# EAGLE board 1 (EAGLE 6.1)

Size 294.62 x 148.26 mm. Coordinates in mm from the lower left corner, seen from the top.
Outline: 0,0 294.62,0 294.62,148.26 0,148.26 0,0
Copper layers (1*16): Top 0.035mm / dielectric 1.5mm / Bottom 0.035mm
Design rules: minimum track width 10mil, minimum drill 24mil, track to track 8mil, track to pad 8mil, pad to pad 8mil, via to via 8mil, smd to smd 8mil, copper to edge 40mil, drill to drill 8mil, minimum pad ring 10mil, minimum via ring 8mil, stop-mask expansion 4mil, vias tented up to drill 0mil, thermal gap 10mil

## Footprints (pad centres in the part's own frame; a part is rotated, then mirrored left to right if it is on the bottom)
C050-035X075 = drill 0.7 pad 1.676 square: 1 -2.54,0; 2 2.54,0
E3,5-8 = drill 0.813 pad 1.6 square: + -1.778,0; - 1.778,0
CAP-PTH-5MM = drill 0.7 pad 1.651 square: 1 -2.5,0; 2 2.5,0
HC49U-V = drill 0.813 square: 1 -2.413,0; 2 2.413,0
DO35-7 = drill 0.813 long: A 3.81,0; C -3.81,0
DO35-10 = drill 0.813 long: A 5.08,0; C -5.08,0
CRAA = drill 1.321 pad 3.15 octagon: + -25.4,-5.08; +@1 -25.4,5.08; - 25.4,0
DIL08 = drill 0.813 long: 1 -3.81,-3.81; 2 -1.27,-3.81; 3 1.27,-3.81; 4 3.81,-3.81; 5 3.81,3.81; 6 1.27,3.81; 7 -1.27,3.81; 8 -3.81,3.81
DIL28-3 = drill 0.813 long: 1 -16.51,-3.81; 2 -13.97,-3.81; 3 -11.43,-3.81; 4 -8.89,-3.81; 5 -6.35,-3.81; 6 -3.81,-3.81; 7 -1.27,-3.81; 8 1.27,-3.81; 9 3.81,-3.81; 10 6.35,-3.81; 11 8.89,-3.81; 12 11.43,-3.81; 13 13.97,-3.81; 14 16.51,-3.81; 15 16.51,3.81; 16 13.97,3.81; 17 11.43,3.81; 18 8.89,3.81; 19 6.35,3.81; 20 3.81,3.81; 21 1.27,3.81; 22 -1.27,3.81; 23 -3.81,3.81; 24 -6.35,3.81; 25 -8.89,3.81; 26 -11.43,3.81; 27 -13.97,3.81; 28 -16.51,3.81
2X3_OFFSET = drill 1.118 pad 1.88 offset: 1 -2.54,-1.27; 2 -2.54,1.27; 3 0,-1.27; 4 0,1.27; 5 2.54,-1.27; 6 2.54,1.27
1X02 = drill 1.016 long: 1 -1.27,0; 2 1.27,0
1X06 = drill 1.016 long: 1 -6.35,0; 2 -3.81,0; 3 -1.27,0; 4 1.27,0; 5 3.81,0; 6 6.35,0
1X05 = drill 1.016 long: 1 -5.08,0; 2 -2.54,0; 3 0,0; 4 2.54,0; 5 5.08,0
G5LE = drill 1.321 long: 1 -7.493,-5.969; 2 -7.493,5.969; O 4.699,5.969; P -9.525,0; S 4.699,-5.969
LED5MM = drill 0.813 octagon: A -1.27,0; K 1.27,0
LSP11 = drill 1.118 pad 2.159 octagon: MP 0,0
MCS10B = drill 1.016 pad 2.159 octagon: MP 0,0
TO-92-AMMO = drill 0.813 pad 1.88: 1 -2.54,0; 2 0,0; 3 2.54,0
0207/10 = drill 0.813 pad 1.778 square: 1 -5.08,0; 2 5.08,0
RTRIM3339P = drill 0.61: 1 -2.54,0; 2 0,-2.54; 3 2.54,0
0207/15 = drill 0.7 pad 1.676 square: 1 -7.62,0; 2 7.62,0
0207/12 = drill 0.7 pad 1.676 square: 1 -6.35,0; 2 6.35,0
AXIAL-0.4 = drill 0.9 pad 1.88 square: P$1 -5.08,0; P$2 5.08,0
TACTILE-PTH = drill 1.016 pad 1.88: 1 -3.251,2.261; 2 3.251,2.261; 3 -3.251,-2.261; 4 3.251,-2.261
BUZZER-12MM = drill 0.9 pad 1.778: + 3.25,0; - -3.25,0
LCD-16X2 = drill 1.016 pad 1.88 square: 1 -32,15.5 | drill 1.016 pad 1.88: 2 -29.46,15.5; 3 -26.92,15.5; 4 -24.38,15.5; 5 -21.84,15.5; 6 -19.3,15.5; 7 -16.76,15.5; 8 -14.22,15.5; 9 -11.68,15.5; 10 -9.14,15.5; 11 -6.6,15.5; 12 -4.06,15.5; 13 -1.52,15.5; 14 1.02,15.5; 15 3.56,15.5; 16 6.1,15.5 | hole 2.8: -37.5,15.5; -37.5,-15.5; 37.5,15.5; 37.5,-15.5
1X10 = drill 1.016 long: 17 25.5,3.81; ADC0 -25.5,-11.43; AGND 25.5,-3.81; BUZZER 25.5,6.35; CTS -25.5,-8.89; GND -25.5,6.35; GND1 -25.5,3.81; GND2 25.5,-11.43; MIC1 25.5,-6.35; MIC2 25.5,-8.89; NWK 25.5,8.89; PS-ON -25.5,1.27; RTC 25.5,11.43; RTS -25.5,-6.35; RXD -25.5,-1.27; SPK1 25.5,-1.27; SPK2 25.5,1.27; TXD -25.5,-3.81; VDD -25.5,11.43; VDD1 -25.5,8.89
W237-4 = drill 1.194 long: 1 -7.5,-1.27; 2 -2.5,-1.27; 3 2.5,-1.27; 4 7.5,-1.27
W237-102 = drill 1.194 long: 1 -2.5,-1.27; 2 2.5,-1.27
TC38H = drill 0.813 pad 1.676: 1 -1.27,0; 2 1.27,0

## Placement (x,y rotation side)
C1  [C050-035X075]  115.57,22.86 0 top
C2  [E3,5-8]  152.4,22.86 0 top
C3  [CAP-PTH-5MM]  156.21,76.2 270 top
C4  [CAP-PTH-5MM]  153.67,76.2 270 top
C5  [CAP-PTH-5MM]  143.51,49.53 0 top
C6  [CAP-PTH-5MM]  158.75,76.2 90 top
CRYSTAL  16-MHZ  [HC49U-V]  156.21,68.58 180 top
D1  1N4148DO35-7  [DO35-7]  101.6,25.4 0 top
D2  1N4148DO35-10  [DO35-10]  265.43,91.44 270 top
D3  1N4148DO35-10  [DO35-10]  265.43,72.39 270 top
D4  1N4148DO35-10  [DO35-10]  265.43,54.61 270 top
D5  1N4148DO35-10  [DO35-10]  265.43,36.83 270 top
G1  CR-AA  [CRAA]  50.8,40.64 0 top
IC2  DS1307  [DIL08]  193.04,34.29 180 top
IC3  AT24CP  [DIL08]  176.53,34.29 180 top
IC4  MEGA8-P  [DIL28-3]  158.75,57.15 180 top
J1  AVR_SPI_PRG_6OFFSET_PADS  [2X3_OFFSET]  205.74,73.66 90 top
JP1  [1X02]  195.58,171.45 0 top  (outside the outline)
JP2  [1X06]  97.79,107.95 90 top
JP3  [1X06]  101.6,107.95 90 top
JP4  [1X05]  83.82,83.82 270 top
K1  G5LE  [G5LE]  247.65,90.17 180 top
K2  G5LE  [G5LE]  247.65,72.39 180 top
K3  G5LE  [G5LE]  247.65,54.61 180 top
K4  G5LE  [G5LE]  247.65,36.83 180 top
LED1  [LED5MM]  114.3,95.25 0 top
LED2  [LED5MM]  114.3,109.22 0 top
LED3  [LED5MM]  109.22,125.73 0 top
LSP1  LSP11  [LSP11]  157.48,45.72 0 top
LSP2  MCS10B  [MCS10B]  186.69,173.99 0 top  (outside the outline)
LSP3  MCS10B  [MCS10B]  234.95,166.37 0 top  (outside the outline)
Q1  [TO-92-AMMO]  149.86,31.75 0 top
Q2  [TO-92-AMMO]  229.87,71.12 270 top
Q3  [TO-92-AMMO]  229.87,62.23 90 top
Q4  [TO-92-AMMO]  229.87,54.61 270 top
Q5  [TO-92-AMMO]  229.87,46.99 90 top
Q6  [TO-92-AMMO]  250.19,121.92 180 top
Q7  [TO-92-AMMO]  250.19,116.84 180 top
Q8  [TO-92-AMMO]  250.19,111.76 180 top
Q9  [TO-92-AMMO]  250.19,106.68 180 top
Q10  [TO-92-AMMO]  97.79,40.64 0 top
Q11  [TO-92-AMMO]  147.32,90.17 0 top
R1  [0207/10]  111.76,83.82 0 top
R2  [RTRIM3339P]  124.46,118.11 180 top
R3  [0207/15]  187.96,120.65 180 top
R4  [0207/12]  135.89,45.72 0 top
R5  [0207/12]  123.19,81.28 270 top
R6  [0207/10]  232.41,83.82 90 top
R7  [0207/10]  229.87,83.82 90 top
R8  [0207/10]  228.6,34.29 270 top
R9  [0207/10]  231.14,34.29 270 top
R10  [0207/10]  264.16,121.92 0 top
R11  [0207/10]  234.95,119.38 0 top
R12  [0207/10]  234.95,121.92 0 top
R13  [0207/10]  264.16,119.38 0 top
R14  [0207/10]  234.95,111.76 180 top
R15  [0207/10]  234.95,116.84 0 top
R16  [0207/10]  264.16,116.84 0 top
R17  [0207/10]  234.95,106.68 180 top
R18  [0207/10]  234.95,114.3 0 top
R19  [0207/10]  264.16,114.3 0 top
R20  [0207/10]  234.95,104.14 180 top
R21  [0207/10]  234.95,109.22 0 top
R22  [0207/10]  217.17,43.18 270 top
R25  [AXIAL-0.4]  91.44,44.45 90 top
R26  [AXIAL-0.4]  163.83,85.09 0 top
R27  [0207/15]  110.49,132.08 0 top
S1  [TACTILE-PTH]  205.74,58.42 0 top
SG1  BUZZERPTH  [BUZZER-12MM]  111.76,49.53 90 top
SG2  BUZZERPTH  [BUZZER-12MM]  111.76,68.58 270 top
U1  LCD-16X2SILK  [LCD-16X2]  170.18,104.14 0 top
U$1  SIM300  [1X10]  55.88,80.01 0 top
X2  [W237-4]  283.21,119.38 270 top
X3  [W237-4]  283.21,99.06 270 top
X4  [W237-4]  283.21,78.74 270 top
X5  [W237-4]  283.21,58.42 270 top
X6  [W237-4]  283.21,38.1 270 top
X7  [W237-102]  283.21,22.86 270 top
Y1  [TC38H]  208.28,39.37 180 top

## Library data of the parts
C1 C2 R1-R22 R27 = rcl
C3-C6 CRYSTAL Q1-Q11 R25 R26 S1 SG1 SG2 U1 Y1 = SparkFun_NPN
D1-D5 = diode
G1 = battery
IC2 = adafruit
IC3 = atmel; MPN: AT24C1024BW-SH-B; OC_FARNELL: 1362646; OC_NEWARK: 03P2044
IC4 = atmel; OC_FARNELL: unknown; OC_NEWARK: unknown
J1 = SparkFun
JP1-JP4 = pinhead
K1-K4 = relay; OC_FARNELL: unknown; OC_NEWARK: unknown
LED1-LED3 = led
LSP1-LSP3 = solpad
U$1 = NPN
X2-X6 = con-wago-500; OC_FARNELL: unknown; OC_NEWARK: unknown
X7 = con-wago-500; MPN: 237-102; OC_FARNELL: unknown; OC_NEWARK: 70K9898

## Nets
+4.1V: C5.2 C6.1 D1.C D2.C D3.C D4.C D5.C G1.+ IC2.3 IC2.8 IC3.8 IC4.7 IC4.20 JP2.1 JP2.2 JP2.3 JP2.4 JP2.5 JP2.6 K1.1 K2.1 K3.1 K4.1 Q11.3 R2.1 R3.1 R12.1 R15.1 R18.1 R21.1 R22.2 SG1.+ SG2.+ U1.2 U$1.VDD X2.1 X2.3 X3.1 X3.3
+5V: C1.1 C2.+ D1.A JP1.2 LED1.A
AREF: IC4.21 LSP1.MP
BUZZER: IC4.16 R4.1
C1: K1.P X4.2
C2: K2.P X5.1
C3: K3.P X5.4
C4: K4.P X6.3
DBG_LED: IC4.19 J1.3 R5.2
DIN1: IC4.26 Q6.3 R12.2
DIN2: IC4.25 Q7.3 R15.2
DIN3: IC4.24 Q8.3 R18.2
DIN4: IC4.23 Q9.3 R21.2
DOUT1: IC4.15 R6.2
DOUT2: IC4.14 R7.2
DOUT3: IC4.13 R8.2
DOUT4: IC4.12 R9.2
GND: C1.2 C2.- C3.1 C4.1 C5.1 C6.2 G1.- IC2.4 IC3.1 IC3.2 IC3.3 IC3.4 IC3.7 IC4.8 IC4.22 J1.6 JP3.1 JP3.2 JP3.3 JP3.4 JP3.5 JP3.6 LED2.K Q1.1 Q2.1 Q3.1 Q4.1 Q5.1 Q6.1 Q7.1 Q8.1 Q9.1 Q10.1 R1.1 R2.3 R11.2 R14.2 R17.2 R20.2 R27.1 S1.3 S1.4 U1.1 U1.5 U1.16 U$1.GND X7.1
LCD/D4: IC4.11 U1.11
LCD/D5: IC4.6 U1.12
LCD/D6: IC4.5 U1.13
LCD/D7: IC4.4 U1.14
LCD/EN: IC4.17 J1.4 U1.6
LCD/RS: IC4.18 J1.1 U1.4
MRX: IC4.2 LSP2.MP U$1.TXD
MTX: IC4.3 LSP3.MP U$1.RXD
N$1: JP1.1 X7.2
N$2: LED1.K R1.2
N$3: LED3.A Q11.1
N$4: U1.7
N$6: R2.2 U1.3
N$7: Q1.3 SG1.-
N$8: Q1.2 R4.2
N$9: LED2.A R5.1
N$10: D2.A K1.2 Q2.3
N$11: Q2.2 R6.1
N$12: D3.A K2.2 Q3.3
N$13: Q3.2 R7.1
N$14: R3.2 U1.15
N$17: D4.A K3.2 Q4.3
N$18: Q4.2 R8.1
N$19: D5.A K4.2 Q5.3
N$20: Q5.2 R9.1
N$21: Q6.2 R10.1 R11.1
N$22: JP4.5 U$1.MIC1
N$23: JP4.4 U$1.MIC2
N$24: JP4.3 U$1.SPK1
N$25: Q7.2 R13.1 R14.1
N$26: JP4.2 U$1.SPK2
N$27: JP4.1 U$1.RTC
N$28: Q8.2 R16.1 R17.1
N$29: IC2.1 Y1.2
N$30: R25.P$1 U$1.BUZZER
N$31: Q9.2 R19.1 R20.1
N$32: IC2.2 Y1.1
N$33: Q10.2 R25.P$2
N$34: Q10.3 SG2.-
N$35: Q11.2 R26.P$2
N$36: LED3.K R27.2
N$37: R26.P$1 U$1.NWK
N$40: IC2.7
NC1: K1.O X4.3
NC2: K2.O X5.2
NC3: K3.O X6.1
NC4: K4.O X6.4
NO1: K1.S X4.1
NO2: K2.S X4.4
NO3: K3.S X5.3
NO4: K4.S X6.2
RST: IC4.1 J1.5 R22.1 S1.1 S1.2
SCL: IC2.6 IC3.6 IC4.28
SDA: IC2.5 IC3.5 IC4.27
SN1: R10.2 X2.2
SN2: R13.2 X2.4
SN3: R16.2 X3.2
SN4: R19.2 X3.4
XTAL1: C3.2 CRYSTAL.1 IC4.9
XTAL2: C4.2 CRYSTAL.2 IC4.10

## Tracks (layer width: path | path; a pad name or v marks a point on that pad's centre or on a via)
+4.1V  (38 unrouted)
+5V  (4 unrouted)
AREF  (1 unrouted)
BUZZER  (1 unrouted)
C1  (1 unrouted)
C2  (1 unrouted)
C3  (1 unrouted)
C4  (1 unrouted)
DBG_LED  (2 unrouted)
DIN1  (2 unrouted)
DIN2  (2 unrouted)
DIN3  (2 unrouted)
DIN4  (2 unrouted)
DOUT1  (1 unrouted)
DOUT2  (1 unrouted)
DOUT3  (1 unrouted)
DOUT4  (1 unrouted)
GND  (46 unrouted)
LCD/D4  (1 unrouted)
LCD/D5  (1 unrouted)
LCD/D6  (1 unrouted)
LCD/D7  (1 unrouted)
LCD/EN  (2 unrouted)
LCD/RS  (2 unrouted)
MRX  (2 unrouted)
MTX  (2 unrouted)
N$1  (1 unrouted)
N$2  (1 unrouted)
N$3  (1 unrouted)
N$6  (1 unrouted)
N$7  (1 unrouted)
N$8  (1 unrouted)
N$9  (1 unrouted)
N$10  (2 unrouted)
N$11  (1 unrouted)
N$12  (2 unrouted)
N$13  (1 unrouted)
N$14  (1 unrouted)
N$17  (2 unrouted)
N$18  (1 unrouted)
N$19  (2 unrouted)
N$20  (1 unrouted)
N$21  (2 unrouted)
N$22  (1 unrouted)
N$23  (1 unrouted)
N$24  (1 unrouted)
N$25  (2 unrouted)
N$26  (1 unrouted)
N$27  (1 unrouted)
N$28  (2 unrouted)
N$29  (1 unrouted)
N$30  (1 unrouted)
N$31  (2 unrouted)
N$32  (1 unrouted)
N$33  (1 unrouted)
N$34  (1 unrouted)
N$35  (1 unrouted)
N$36  (1 unrouted)
N$37  (1 unrouted)
NC1  (1 unrouted)
NC2  (1 unrouted)
NC3  (1 unrouted)
NC4  (1 unrouted)
NO1  (1 unrouted)
NO2  (1 unrouted)
NO3  (1 unrouted)
NO4  (1 unrouted)
RST  (4 unrouted)
SCL  (2 unrouted)
SDA  (2 unrouted)
SN1  (1 unrouted)
SN2  (1 unrouted)
SN3  (1 unrouted)
SN4  (1 unrouted)
XTAL1  (2 unrouted)
XTAL2  (2 unrouted)